# EAGLE board ioboard (EAGLE 7.5.0)
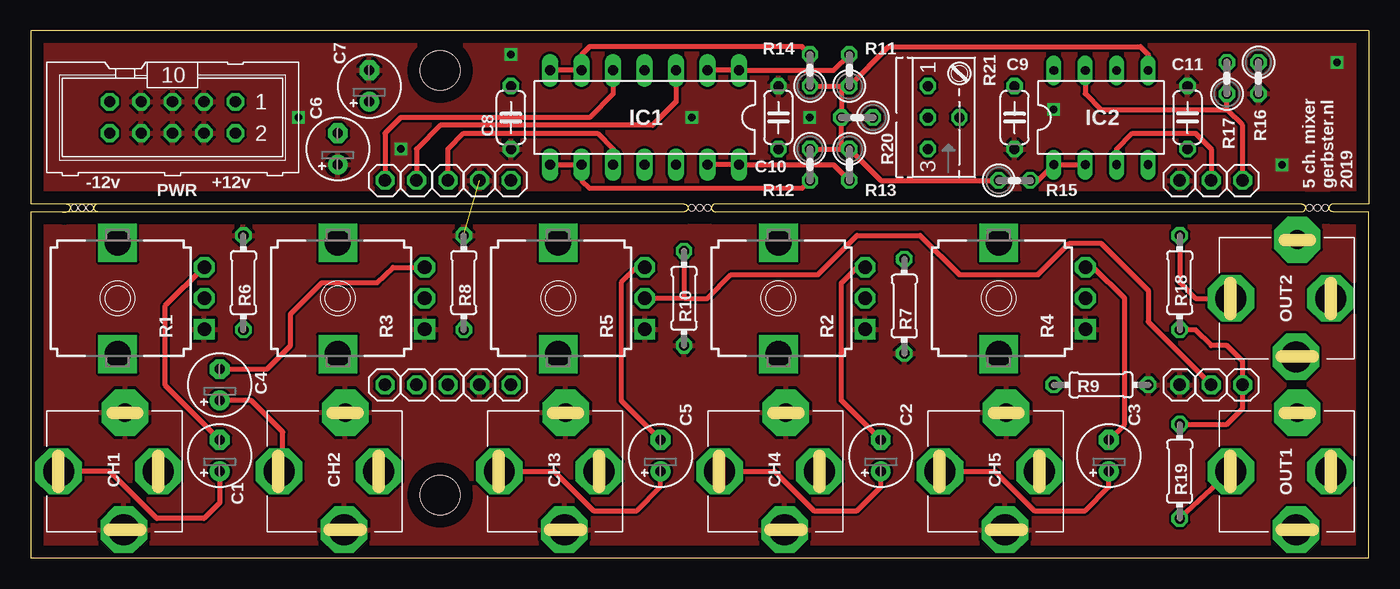
[diagram p0: board, top side]
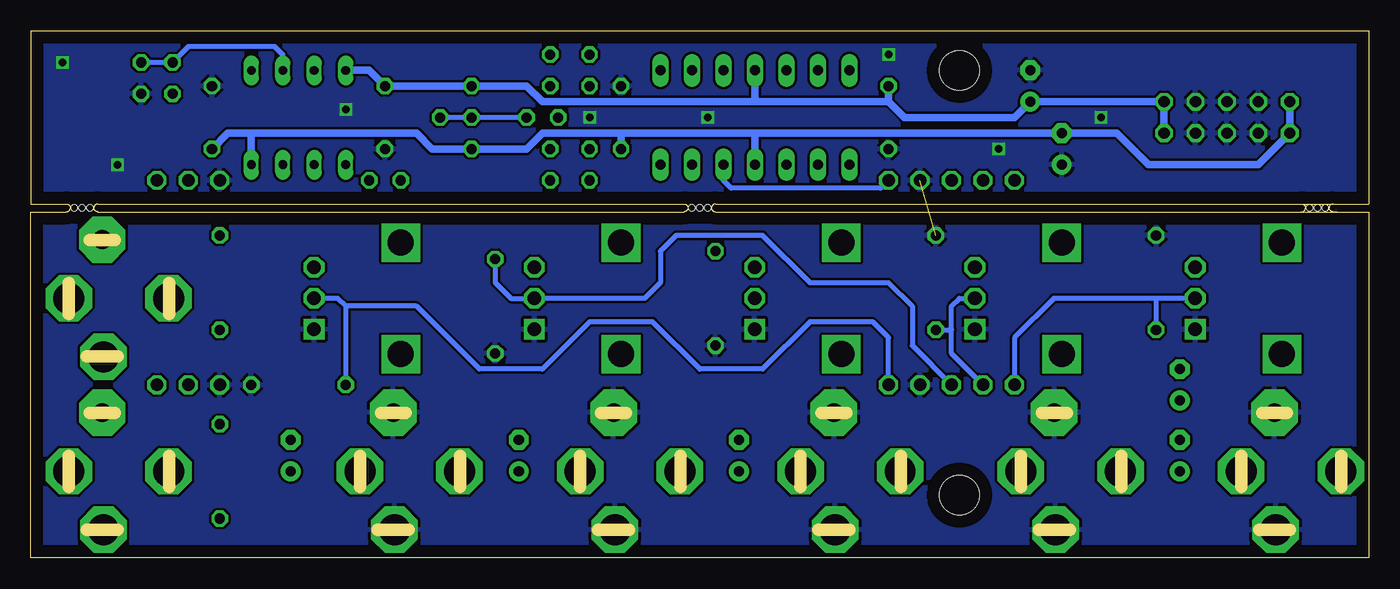
[diagram p1: board, bottom side, seen from below]

Size 107.95 x 42.55 mm. Coordinates in mm from the lower left corner, seen from the top.
Outline: 5.4,28.57 52.7,28.57 arc-90 53.02,28.26 arc-90 52.7,27.94 0,27.94 0,0 107.95,0 107.95,27.94 105.09,27.94 arc-90 104.78,28.26 arc-90 105.09,28.57 107.95,28.57 107.95,42.55 0,42.55 0,28.57 2.86,28.57
Outline: 5.4,28.57 2.86,28.57
Outline: 2.86,28.57 arc-90 3.17,28.26 arc-90 2.86,27.94 2.54,27.94
Outline: 5.4,28.57 arc90 5.08,28.26 arc90 5.4,27.94 5.71,27.94
Outline: 102.55,27.94 55.24,27.94 arc-90 54.93,28.26 arc-90 55.24,28.57 102.55,28.57 arc-90 102.87,28.26 arc-90 102.55,27.94
Copper layers (1*16): Top 0.035mm / dielectric 1.5mm / Bottom 0.035mm
Design rules "default": minimum track width 10mil, minimum drill 24mil, track to track 8mil, track to pad 8mil, pad to pad 8mil, via to via 8mil, smd to smd 8mil, copper to edge 40mil, drill to drill 8mil, minimum pad ring 10mil, minimum via ring 8mil, stop-mask expansion 4mil, vias tented up to drill 0mil, thermal gap 10mil
Holes 3.17 mm at 33.02,39.37 33.02,5.08
Holes 0.5 mm at 3.49,28.26 4.13,28.26 4.76,28.26 104.46,28.26 103.82,28.26 103.19,28.26 53.98,28.26 54.61,28.26 53.34,28.26

## Footprints (pad centres in the part's own frame; a part is rotated, then mirrored left to right if it is on the bottom)
E2,5-5 = drill 0.813 pad 1.6: + -1.27,0 | drill 0.813 pad 1.6 octagon: - 1.27,0
C050-024X044 = drill 0.813 octagon: 1 -2.54,0; 2 2.54,0
PJ301BM = drill 2.5 pad 3.75 octagon: GND1 -4.719,-0.5; SWITCH 0,-3.3; TIP 0,4.746 | drill 1.5 pad 3.75 octagon: GND2 4.746,-0.6
DIL14 = drill 0.813 long: 1 -7.62,-3.81; 2 -5.08,-3.81; 3 -2.54,-3.81; 4 0,-3.81; 5 2.54,-3.81; 6 5.08,-3.81; 7 7.62,-3.81; 8 7.62,3.81; 9 5.08,3.81; 10 2.54,3.81; 11 0,3.81; 12 -2.54,3.81; 13 -5.08,3.81; 14 -7.62,3.81
DIL08 = drill 0.7 long: 1 -3.81,-3.81; 2 -1.27,-3.81; 3 1.27,-3.81; 4 3.81,-3.81; 5 3.81,3.81; 6 1.27,3.81; 7 -1.27,3.81; 8 -3.81,3.81
1X01 = drill 1.016 octagon: 1 0,0
ML10 = drill 0.914 octagon: 1 -5.08,-1.27; 2 -5.08,1.27; 3 -2.54,-1.27; 4 -2.54,1.27; 5 0,-1.27; 6 0,1.27; 7 2.54,-1.27; 8 2.54,1.27; 9 5.08,-1.27; 10 5.08,1.27
EVUF = drill 1.1 pad 1.676 square: 1 -2.5,-7 | drill 1.1 pad 1.676 octagon: 2 0,-7; 3 2.5,-7 | drill 2.1 pad 2.8 square: M1 4.5,0; M2 -4.5,0
0204/7 = drill 0.813 octagon: 1 -3.81,0; 2 3.81,0
0207/2V = drill 0.813 octagon: 1 -1.27,0; 2 1.27,0
S64YW = drill 0.813 octagon: A 2.54,1.27; E -2.54,1.27; S 0,-1.27; S@1 0,1.27

## Placement (x,y rotation side)
C1  10uf  [E2,5-5]  15.24,8.26 90 top
C2  10uf  [E2,5-5]  68.58,8.26 90 top
C3  10uf  [E2,5-5]  87,8.26 90 top
C4  10uf  [E2,5-5]  15.24,13.97 90 top
C5  10uf  [E2,5-5]  50.8,8.26 90 top
C6  10uf  [E2,5-5]  24.77,33.02 90 top
C7  10uf  [E2,5-5]  27.3,38.1 90 top
C8  .1uf  [C050-024X044]  38.73,35.56 270 top
C9  .1uf  [C050-024X044]  79.38,35.56 270 top
C10  .1uf  [C050-024X044]  60.33,35.56 90 top
C11  .1uf  [C050-024X044]  93.34,35.56 90 top
CH1  INPUT_1  [PJ301BM]  6.99,6.99 90 top
CH2  INPUT_2  [PJ301BM]  24.77,6.99 90 top
CH3  INPUT_3  [PJ301BM]  42.55,6.99 90 top
CH4  INPUT_4  [PJ301BM]  60.33,6.99 90 top
CH5  INPUT_5  [PJ301BM]  78.11,6.99 90 top
IC1  TL074P  [DIL14]  49.53,35.56 180 top
IC2  TL072P  [DIL08]  86.36,35.56 0 top
JP1  [1X01]  28.57,13.97 90 top
JP2  [1X01]  31.11,30.48 90 top
JP3  [1X01]  31.11,13.97 90 top
JP4  [1X01]  28.57,30.48 90 top
JP5  [1X01]  33.66,13.97 90 top
JP6  [1X01]  33.66,30.48 90 top
JP7  [1X01]  38.73,13.97 90 top
JP8  [1X01]  38.73,30.48 90 top
JP9  [1X01]  95.25,13.97 90 top
JP10  [1X01]  95.25,30.48 90 top
JP11  [1X01]  36.2,13.97 90 top
JP12  [1X01]  36.2,30.48 90 top
JP13  [1X01]  92.71,30.48 90 top
JP14  [1X01]  92.71,13.97 90 top
JP15  [1X01]  97.79,13.97 90 top
JP16  [1X01]  97.79,30.48 90 top
OUT1  OUTPUT_2  [PJ301BM]  101.6,6.99 90 top
OUT2  OUTPUT_1  [PJ301BM]  101.6,20.95 90 top
PWR  [ML10]  11.43,35.56 180 top
R1  1M  [EVUF]  6.99,20.95 90 top
R2  1M  [EVUF]  60.33,20.95 90 top
R3  1M  [EVUF]  24.77,20.95 90 top
R4  1M  [EVUF]  78.11,20.95 90 top
R5  1M  [EVUF]  42.55,20.95 90 top
R6  100k  [0204/7]  17.14,22.23 270 top
R7  100k  [0204/7]  70.48,20.32 90 top
R8  100k  [0204/7]  34.92,22.23 270 top
R9  100k  [0204/7]  86.36,13.97 180 top
R10  100k  [0204/7]  52.7,20.95 90 top
R11  4.7k  [0207/2V]  66.04,39.37 90 top
R12  4.7k  [0207/2V]  62.87,31.75 270 top
R13  4.7k  [0207/2V]  66.04,31.75 270 top
R14  4.7k  [0207/2V]  62.87,39.37 90 top
R15  4.7k  [0207/2V]  79.38,30.48 0 top
R16  10k  [0207/2V]  99.06,38.73 270 top
R17  39k  [0207/2V]  96.52,38.73 90 top
R18  1k  [0204/7]  92.71,22.23 270 top
R19  1k  [0204/7]  92.71,6.99 90 top
R20  100k  [0207/2V]  66.67,35.56 180 top
R21  100k  [S64YW]  73.66,35.56 90 top

## Library data of the parts
C1-C11 R6-R20 = resistor
CH1-CH5 OUT1 OUT2 = gerbster
IC1 = linear
IC2 R1-R5 = TomW
JP1-JP16 = pinhead
PWR = con-ml; OC_FARNELL: unknown; OC_NEWARK: unknown
R21 = pot

## Nets
+12V: C7.+ C8.1 C9.1 IC1.4 IC2.8 PWR.1 PWR.2 R21.A
-12V: C6.- C10.1 C11.1 IC1.11 IC2.4 PWR.9 PWR.10 R21.E
GND: C6.+ C7.- C8.2 C9.2 C10.2 C11.2 CH1.GND1 CH1.GND2 CH2.GND1 CH2.GND2 CH3.GND1 CH3.GND2 CH4.GND1 CH4.GND2 CH5.GND1 CH5.GND2 JP11.1 JP12.1 JP13.1 JP14.1 PWR.3 PWR.4 PWR.5 PWR.6 PWR.7 PWR.8 R1.1 R2.1 R3.1 R4.1 R5.1 R6.1 R7.1 R8.1 R9.1 R10.1 R16.2
N$1: IC1.6 IC1.7 R14.2
N$2: IC1.1 IC1.2 R11.2
N$3: IC1.8 IC1.9 R12.2
N$4: JP5.1 R2.2 R7.2
N$5: JP1.1 R1.2 R6.2
N$6: JP3.1 R3.2 R8.2
N$7: JP7.1 R4.2 R9.2
N$8: JP9.1 R5.2 R10.2
N$9: IC1.13 IC1.14 R13.2
N$10: C1.+ CH1.TIP
N$11: C2.+ CH4.TIP
N$12: C4.+ CH2.TIP
N$13: C5.+ CH3.TIP
N$14: IC2.1 IC2.2 R15.2
N$15: C1.- R1.3
N$16: C2.- R2.3
N$17: C4.- R3.3
N$18: C3.- R4.3
N$19: C3.+ CH5.TIP
N$20: IC2.5 R11.1 R12.1 R13.1 R14.1 R15.1 R20.2
N$21: IC1.3 JP2.1
N$22: IC1.5 JP4.1
N$23: JP15.1 R18.2 R19.2
N$24: R20.1 R21.S
N$25: C5.- R5.3
N$26: IC2.6 R16.1 R17.2
N$27: OUT2.TIP R18.1
N$28: OUT1.TIP R19.1
N$29: IC1.10 JP6.1
N$30: IC1.12 JP8.1
N$31: IC2.3 JP10.1
N$32: IC2.7 JP16.1 R17.1

## Tracks (layer width: path | path; a pad name or v marks a point on that pad's centre or on a via)
+12V
  Bottom 0.61: PWR.2 PWR.1 C7.+ 28.57,35.56 37.47,35.56 38.73,36.83 | C8.1 38.73,36.83 | 38.73,36.83 49.53,36.83 | IC1.4 49.53,36.83 | 49.53,36.83 66.67,36.83 67.94,38.1 R21.A C9.1 80.64,39.37 IC2.8
-12V
  Bottom 0.61: PWR.9 PWR.10 8.89,31.75 17.78,31.75 20.32,34.29 C6.- 49.53,34.29 | IC1.11 49.53,34.29 | 49.53,34.29 60.33,34.29 | C10.1 60.33,34.29 | 60.33,34.29 66.67,34.29 67.94,33.02 R21.E 75.56,33.02 76.83,34.29 90.17,34.29 | 90.17,34.29 IC2.4 | C11.1 92.08,34.29 90.17,34.29
GND  (via drill 0.6)  (1 unrouted)
  other vias: 53.34,35.56 62.87,35.56 105.41,40.01 100.97,31.75 29.84,33.02 38.73,40.64 21.59,35.56 82.55,36.2
  pour Top: 0,42.55 0,28.57 107.95,28.57 107.95,42.55
  pour Bottom: 0,27.94 0,0 107.95,0 107.95,27.94
  pour Top: 0,27.94 0,0 107.95,0 107.95,27.94
  pour Bottom: 0,42.55 0,28.57 107.95,28.57 107.95,42.55
N$1
  Top 0.406: IC1.7 IC1.6 44.45,40.64 45.09,41.27 62.23,41.27 R14.2
N$2
  Top 0.406: IC1.2 IC1.1 64.77,39.37 R11.2
N$3
  Top 0.406: IC1.8 IC1.9 44.45,30.48 45.09,29.84 62.23,29.84 R12.2
N$4
  Bottom 0.406: R7.2 70.48,22.23 69.22,20.95 R2.2 58.42,20.95 57.15,22.23 57.15,24.77 55.88,26.04 48.9,26.04 45.09,22.23 38.73,22.23 36.83,20.32 36.83,17.14 JP5.1 33.66,14.61
N$5
  Bottom 0.406: R1.2 17.14,20.95 | R6.2 17.14,20.95 | 17.14,20.95 25.4,20.95 28.57,17.78 JP1.1
N$6
  Bottom 0.406: R8.2 33.66,18.41 | JP3.1 33.66,16.51 33.66,18.41 | 33.66,18.41 33.66,20.32 33.02,20.95 R3.2
N$7
  Bottom 0.406: 82.55,20.32 83.19,20.95 R4.2 | JP7.1 38.73,17.78 40.01,19.05 45.09,19.05 48.9,15.24 53.98,15.24 57.78,19.05 62.87,19.05 66.67,15.24 71.75,15.24 76.83,20.32 82.55,20.32 | 82.55,20.32 R9.2
N$8
  Top 0.406: 52.7,21.59 R10.2 52.7,20.95 | 52.7,20.95 R5.2 | 52.7,20.95 54.61,20.95 56.52,22.86 63.5,22.86 66.67,26.04 71.75,26.04 74.93,22.86 81.28,22.86 83.82,25.4 86.36,25.4 90.17,21.59 90.17,19.05 JP9.1
N$9
  Top 0.406: IC1.13 IC1.14 64.77,31.75 R13.2
N$10
  Top 0.406: C1.+ 15.24,4.45 13.97,3.17 10.16,3.17 6.35,6.99 CH1.TIP
N$11
  Top 0.406: CH4.TIP 60.01,6.99 63.18,3.81 66.67,3.81 68.58,5.71 C2.+
N$12
  Top 0.406: CH2.TIP 20.32,6.99 20.32,10.16 17.78,12.7 C4.+
N$13
  Top 0.406: CH3.TIP 42.23,6.99 45.4,3.81 48.9,3.81 50.8,5.71 C5.+
N$14
  Top 0.406: IC2.2 IC2.1 81.28,30.48 R15.2
N$15
  Top 0.406: R1.3 13.98,23.5 10.79,20.32 10.79,13.97 C1.-
N$16
  Top 0.406: C2.- 65.41,12.7 65.41,22.18 66.67,23.45 67.94,23.5 R2.3
N$17
  Top 0.406: C4.- 19.05,15.24 20.95,17.14 20.95,19.68 23.5,22.23 27.94,22.23 29.21,23.45 R3.3
N$18
  Top 0.406: C3.- 88.27,10.79 88.27,20.95 85.72,23.45 R4.3
N$19
  Top 0.406: CH5.TIP 77.79,6.99 80.96,3.81 85.09,3.81 87,5.71 C3.+
N$20
  Top 0.406: R14.1 R11.1 | R11.1 65.41,38.1 R20.2 65.41,33.02 | R12.1 65.41,33.02 | 65.41,33.02 R13.1 68.58,30.48 R15.1 | R11.1 69.22,41.27 89.53,41.27 90.17,40.64 IC2.5
N$21
  Top 0.406: IC1.3 52.07,36.83 50.16,34.92 33.02,34.92 31.11,33.02 JP2.1
N$22
  Top 0.406: IC1.5 46.99,37.47 45.09,35.56 29.84,35.56 28.57,34.29 JP4.1
N$23
  Top 0.406: R19.2 96.52,10.79 97.79,12.06 JP15.1 97.79,15.88 96.52,17.14 95.25,17.14 93.98,18.41 R18.2
N$24
  Bottom 0.406: R20.1 R21.S
N$25
  Top 0.406: R5.3 48.91,23.5 47.62,22.23 47.62,12.7 C5.-
N$26
  Bottom 0.406: R16.1 R17.2 95.25,41.27 88.27,41.27 87.63,40.64 IC2.6
N$27
  Top 0.406: R18.1 92.71,22.23 93.98,20.95 OUT2.TIP 97.16,20.95
N$28
  Top 0.406: OUT1.TIP R19.1
N$29
  Top 0.406: JP6.1 33.66,33.02 34.92,34.29 45.72,34.29 46.99,33.02 IC1.10
N$30
  Bottom 0.406: JP8.1 39.37,29.84 51.44,29.84 52.07,30.48 IC1.12
N$31
  Top 0.406: IC2.3 87.63,33.02 88.9,34.29 93.98,34.29 95.25,33.02 JP10.1
N$32
  Top 0.406: IC2.7 85.09,37.47 86.36,36.2 96.52,36.2 | 96.52,36.2 R17.1 | JP16.1 97.79,34.92 96.52,36.2

## Text on the board
tNames: -12v | +12v | 5 ch. mixer / gerbster.nl / 2019